# Altium PCB SignalAnalyse.PcbDoc (part 1 of 2)
Units mil, origin at the board's own origin, x right, y up, seen from the top; angles counter-clockwise.
Board outline 5265 x 1800 mil, 2 copper layers (Top Layer, Bottom Layer); 89 components, 53 nets, 353 pads, 52 vias.
Unrouted connection lines stored in the file: 1.
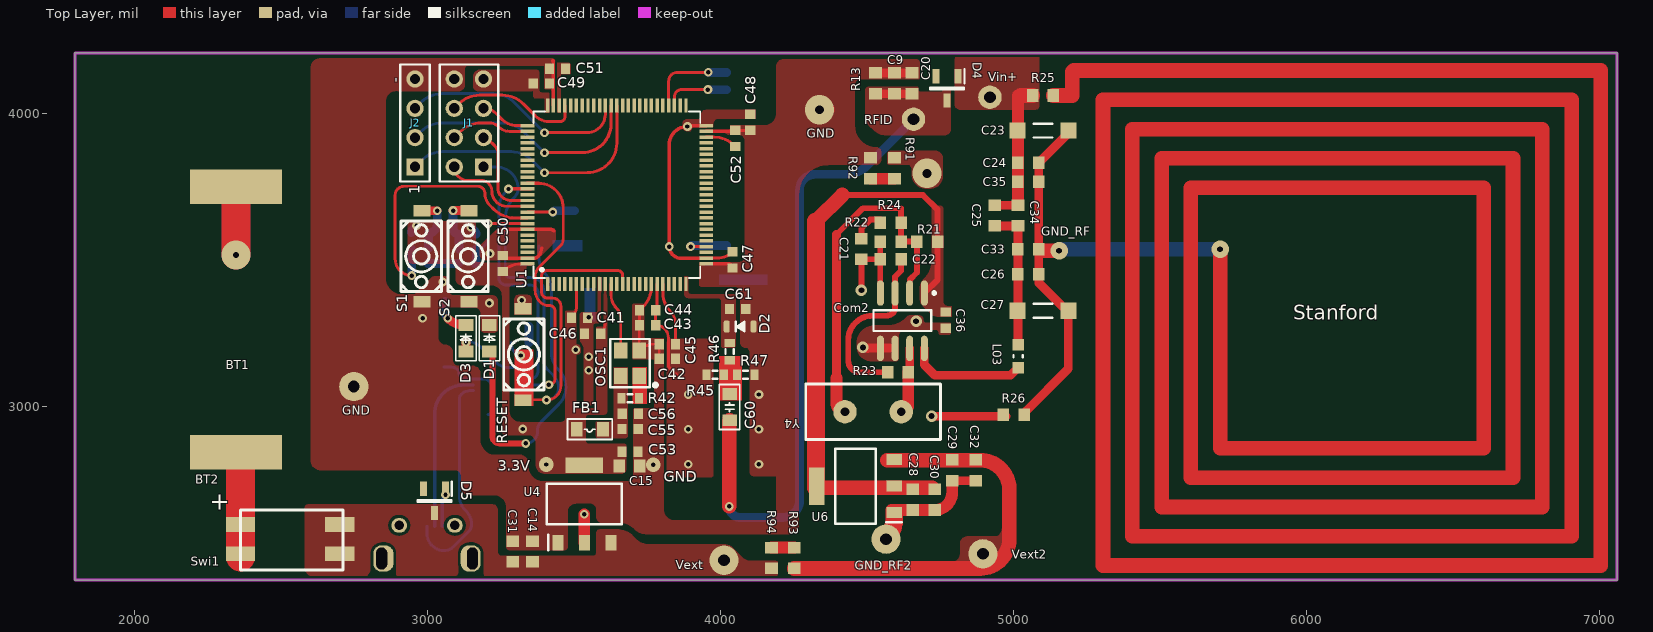
[diagram p0: Top Layer view]
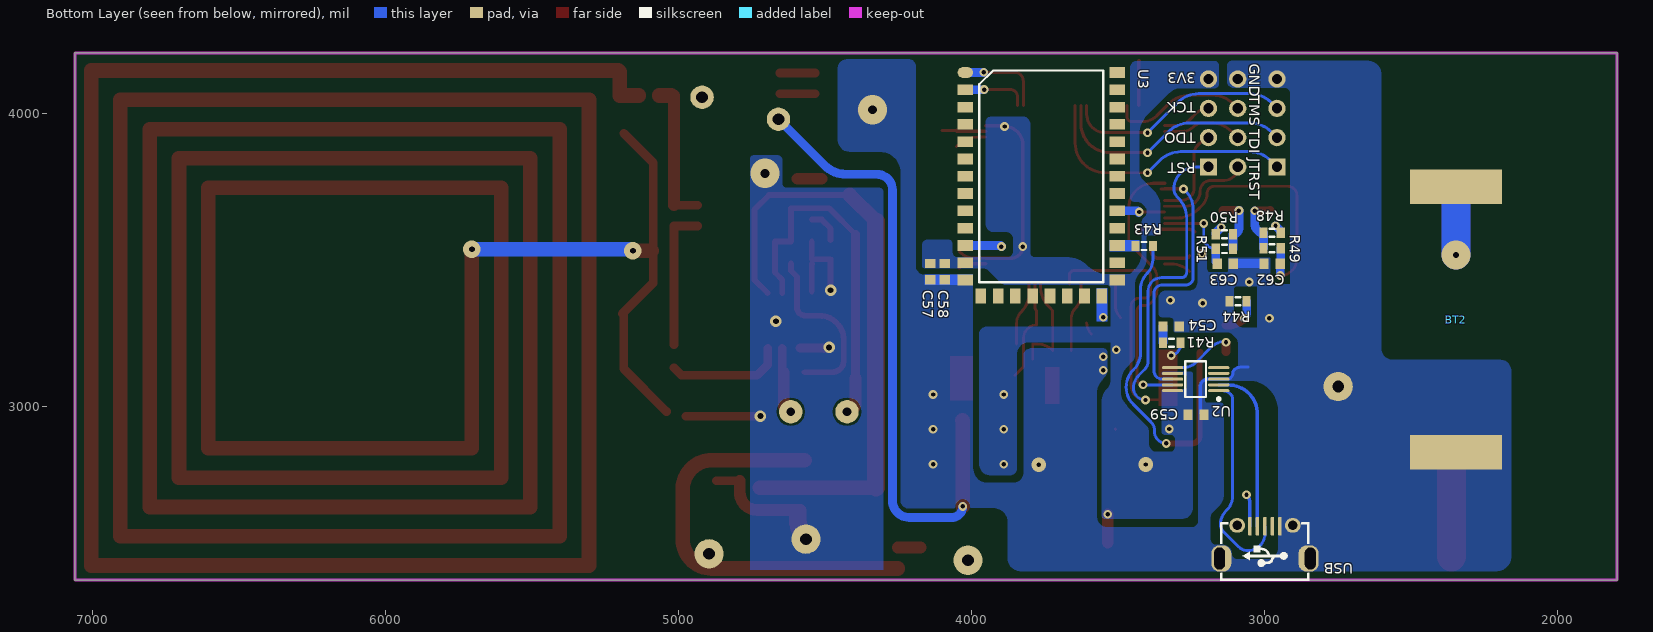
[diagram p1: Bottom Layer view, seen from below]

## Layer stack, top to bottom
Top Solder: solder mask 0.4, Solder Resist, Dk 3.5
Top Layer: signal copper 1.4
Dielectric 1: dielectric 12.6, FR-4, Dk 4.8
Bottom Layer: signal copper 1.4
Bottom Solder: solder mask 0.4, Solder Resist, Dk 3.5

## Board outline
1796,2407 7061,2407 7061,4207 1796,4207

## Design rules (kind name [scope] priority, off if disabled: settings)
Clearance [All] p1: gap=8 ignorepadtopadclearanceinfootprint=FALSE
PlaneClearance [All] p1: clearance=10
PlaneConnect [All] p1: planeconnectstyle=Direct reliefexpansion=20 reliefentries=4 reliefconductorwidth=10 reliefairgap=10
PolygonConnect [All] p1: connectstyle=Direct reliefconductorwidth=10 reliefentries=4 polygonreliefangle="90 Angle" airgapwidth=10
RoutingVias [All] p1: holewidth=15 width=30 viastyle="Through Hole" minholewidth=8 minwidth=20 maxholewidth=50 maxwidth=80
SolderMaskExpansion [All] p1: expansion=4
Width [All] p1: maxlimit=100 minlimit=8 preferedwidth=10
28 further rules are at their usual default settings.

## Classes and differential pairs
component class RFID_transmitter_V2: BT1 BT2 C9 C14 C15 C20 C21 C22 C23 C24 C25 C26 C27 C28 C29 C30 C31 C32 C33 C34 C35 C36 Com2 D4 D5 L03 R13 R21 R22 R23 R24 R25 R26 R91 R92 R93 R94 Swi1 U4 U6 Y4
component class SignalAnalyse: C41 C42 C43 C44 C45 C46 C47 C48 C49 C50 C51 C52 C53 C54 C55 C56 C57 C58 C59 C60 C61 C62 C63 D1 D2 D3 FB1 J1 J2 OSC1 R41 R42 R43 R44 R45 R46 R47 R48 R49 R50 R51 RESET S1 S2 U1 U2 U3 USB

## Components (designator, comment, footprint, x,y, rotation, side; value= is the part's Value field where it differs from the comment)
BT1 "Battery" Battery 2346,3297 r90 top
BT2 "Battery" Battery 2346,3297 r270 bottom
C9 "Cap 10n" 0603 4594,4103.57 r270 top value="200 nF"
C14 "Cap 10u" 0603 3358,2505 r270 top value=10uF
C15 "Cap 22u" 0603 3689,2797 r180 top value=22uF
C20 "Cap 4.7n" 0603 4654,4103.57 r270 top value="50 pF"
C21 "Cap 820p" 0603 4481,3537.98 r90 top value=820pF
C22 "Cap 200p" 0603 4581,3502.98 r0 top value=200pF
C23 "Cap Var" Variable_Capacitor_JZ400HV1 5101,3942 r180 top value=100pF
C24 "Cap" 0603 5051,3832 r180 top value=22pF
C25 "Cap" 0603 4936,3652 r270 top value=27pF
C26 "random value needs carefully address" 0603 5051,3452 r0 top value=470pF
C27 "Cap Var" Variable_Capacitor_JZ400HV1 5101,3327 r180 top value=100pF
C28 "Cap 100n" 0603 4656,2682 r90 top value=100nF
C29 "Cap 10u" 0603 4791,2782 r90 top value=10uF
C30 "Cap 22u" 0603 4731,2682 r90 top value=22uF
C31 "Cap 10n" 0603 3291,2505 r270 top value=10nF
C32 "Cap 10n" 0603 4871,2782 r90 top value=10nF
C33 "random value needs carefully address" 0603 5051,3537 r0 top value=1pF
C34 "Cap" 0603 5016,3652 r270 top value=1pF
C35 "Cap" 0603 5051,3767 r180 top value=1pF
C36 "GRM188R61A226ME15D" 1608[0603] 4769,3295 r270 top value=100nF
C41 "GRM188R61A226ME15D" 1608[0603] 3518.56,3303 r0 top value=1uF
C42 "GRM188R61A226ME15D" 1608[0603] 3818.44,3163 r180 top value=1uF
C43 "GRM188R61A226ME15D" 1608[0603] 3751,3278 r0 top value=1uF
C44 "GRM188R61A226ME15D" 1608[0603] 3751,3328 r0 top value=100nF
C45 "GRM188R61A226ME15D" 1608[0603] 3818.44,3213 r180 top value=100nF
C46 "GRM188R61A226ME15D" 1608[0603] 3563.56,3248 r0 top value=100nF
C47 "GRM188R61A226ME15D" 1608[0603] 4041,3500.56 r90 top value=100nF
C48 "GRM188R61A226ME15D" 1608[0603] 4101,3970.56 r90 top value=100nF
C49 "GRM188R61A226ME15D" 1608[0603] 3388.44,4103 r180 top value=100nF
C50 "GRM188R61A226ME15D" 1608[0603] 3256,3488.44 r270 top value=100nF
C51 "GRM188R61A226ME15D" 1608[0603] 3443.44,4153 r0 top value=2.2uF
C52 "GRM188R61A226ME15D" 1608[0603] 4051,3915.44 r270 top value=2.2uF
C53 "GRM188R61A226ME15D" 1608[0603] 3691,2846 r180 top value=4.7uF
C54 "GRM188R61A226ME15D" 1608[0603] 3318.44,3273 r180 bottom value=100nF
C55 "GRM188R61A226ME15D" 1608[0603] 3691.56,2923 r0 top value=10uF
C56 "GRM188R61A226ME15D" 1608[0603] 3692,2975 r0 top value=100nF
C57 "GRM188R61A226ME15D" 1608[0603] 4141,3460.44 r270 bottom value=10uF
C58 "GRM188R61A226ME15D" 1608[0603] 4091,3460.44 r270 bottom value=1uF
C59 "GRM188R61A226ME15D" 1608[0603] 3233.44,2972 r180 bottom value=10uF
C60 "Cap Ceramic" C0805 4031,2998 r270 top value=22uF
C61 "Cap Semi" 1608[0603] 4058.56,3333 r180 top value=33nF
C62 "GRM188R61A226ME15D" 1608[0603] 2973.56,3488 r0 bottom value=10uF
C63 "GRM188R61A226ME15D" 1608[0603] 3133.56,3488 r180 bottom value=10uF
Com2 "LT1016" LT1016_SOIC 4621,3292.98 r270 top
D1 "LED" D0805 3211,3233 r90 top
D2 "TDZ3V0J" SOD-323 4067,3273 r180 top
D3 "LED-Green" D0805 3131,3233 r90 top
D4 "SMMBD301LT3G" SOT96P237X111-3N 4774,4086 r270 top
D5 "SMMBD301LT3G" SOT96P237X111-3N 3023.4,2677.66 r270 top
FB1 "120Ohm@100MHz" L0805 3554,2922 r180 top value=120R
J1 "JTAG Header" HDR2X4 3191,3818 r90 top
J2 "Header 4" HDR1X4 2957,3818 r90 top
L03 "Inductor 220 nH" Ferrite_bead_0805inch_2012mm 5016,3172 r90 top
OSC1 "16MHz" OSC_3.2X2.5 3691,3148 r90 top
R13 "Res1" 0603 4529,4103.57 r270 top value=1.1k
R21 "Res1 2.2k" 0603 4706,3562.98 r0 top value=2.2K
R22 "Res1 2.2k" 0603 4581,3562.98 r0 top value=2.2K
R23 "Res1 2.2k" 0603 4606,3117 r180 top value=2.2K
R24 "Res1 22" 0603 4581,3627 r0 top value=22Ohm
R25 "" 0603 5101,4062 r180 top value="2.2-antenna resistance value"
R26 "Magnetic Beed" 0603 5001,2972 r0 top value=0
R41 "Res" J1-0603 3316.47,3218 r180 bottom value=1K
R42 "Res" J1-0603 3691.47,3028 r180 top value=1K
R43 "Res" J1-0603 3410.53,3548 r0 bottom value=1K
R44 "Res" J1-0603 3090,3359 r0 bottom value=1K
R45 "Res" J1-0603 3981.47,3108 r180 top value=12K
R46 "Res" J1-0603 4031,3187.53 r90 top value=1K
R47 "Res" J1-0603 4086,3108 r180 top value=10K
R48 "Res" J1-0603 2973.56,3593 r180 bottom value=10K
R49 "Res" J1-0603 2973.56,3540.5 r0 bottom value=1K
R50 "Res" J1-0603 3136.47,3588 r0 bottom value=10K
R51 "Res" J1-0603 3136.47,3538 r180 bottom value=1K
R91 "Magnetic Beed" 0603 4594,3813.43 r270 top value=0
R92 "Magnetic Beed" 0603 4512,3813.43 r90 top value=0
R93 "Magnetic Beed" 0603 4252,2483 r270 top value="0 Ohm"
R94 "Magnetic Beed" 0603 4174,2483 r90 top value="0 Ohm"
RESET "Button" K2-1107ST-A4SW-06 3326,3022 r90 top (schematic designator S3)
S1 "Button" K2-1107ST-A4SW-06 2981,3669 r270 top
S2 "Button" K2-1107ST-A4SW-06 3141,3669 r270 top
Swi1 "Switch_219-2MSTR" Switch_219-2MSTR 2361,2547 r270 top
U1 "STM32F767VIT6" STM32F767VIT6 3646,3723 r90 top value=Value
U2 "CH340E" CH340E 3234.74,3093.32 r0 bottom
U3 "HC-06" HC-06 4021,4140.44 r180 bottom
U4 "LT1117IST-3.3#PBF" SOT230P700X180-4N 3535,2667 r90 top
U6 "LT1117IST-5#PBF" SOT230P700X180-4N 4461,2728 r180 top
USB "MicroUSB" USB_Micro-AB 2998,2491 r0 bottom (schematic designator CON2)
Y4 "TSX3325_13.56MHz" HC_49Crystal 4521,2982 r180 top

## Footprints (in the part's own frame and the unit in brackets; to place one, negate y for a bottom-side part, rotate by r counter-clockwise, add the part's x,y. Pads: shape width x height; smd on the part's side, far side on the other; paste and mask are expansions set on the pad)
0603 [mm] "0603Resistor_Capacitor"
  rect 1x1.1 smd: 1(-0.9,0) 2(0.9,0)
  body extent -0.77,-0.45 0.77,0.45, height 0.45
1608[0603] [mm] "Chip Capacitor, Body 1.6x0.8mm, IPC High Density"
  rect 0.8x0.9 smd: 1(-0.7,0) 2(0.7,0)
  body extent -0.87,-0.48 0.87,0.48, height 1.3
Battery [mm]
  rect 3x8 smd: 1(-11.508,0) 2(11.508,0)
C0805 [mil]
  rect 40x50 smd: 1(45,0) 2(-45,0)
  silkscreen extent -77,-35 77,35, body extent -49,-24 49,25, height 31
CH340E [mm] "MSOP, 10-Leads, Body 3.00x3.00mm, Pitch 0.50mm, IPC Medium Density"
  oval 1.85x0.254 smd: 1(-2,1) 2(-2,0.5) 3(-2,0) 4(-2,-0.5) 5(-2,-1) 6(2,-1) 7(2,-0.5) 8(2,0) 9(2,0.5) 10(2,1)
  silkscreen extent -2.12,-1.55 0.9,1.85, body extent -1.55,-1.55 1.55,1.55, height 1.1
D0805 [mil]
  rect 40x50 smd: 1(-45,0) 2(45,0)
  silkscreen extent -77,-35 77,35, body extent -40,-25 40,25, height 43
Ferrite_bead_0805inch_2012mm [mm] "Ferrite_bead_MH2029-300Y"
  rect 1x1 smd: 1(-1,0) 2(1,0)
  silkscreen extent -0.1,-0.4 0.1,0.4, body extent -1.1,-0.7 1.1,0.7, height 1.1
HC-06 [mm]
  oval 1.34x0.923 smd: 1(0,0)
  rect 1.34x0.923 smd: 2(0,-1.5) 3(0,-3) 4(0,-4.5) 5(0,-6) 6(0,-7.5) 7(0,-9) 8(0,-10.5) 9(0,-12) 10(0,-13.5) 11(0,-15) 12(0,-16.5) 13(0,-18) 22(13.177,-18) 23(13.177,-16.5) 24(13.177,-15) 25(13.177,-13.5) 26(13.177,-12) 27(13.177,-10.5) 28(13.177,-9) 29(13.177,-7.5) 30(13.177,-6) 31(13.177,-4.5) 32(13.177,-3) 33(13.177,-1.5) 34(13.177,0)
  rect 0.923x1.34 smd: 14(1.339,-19.385) 15(2.839,-19.385) 16(4.339,-19.385) 17(5.838,-19.385) 18(7.338,-19.385) 19(8.838,-19.385) 20(10.338,-19.385) 21(11.838,-19.385)
  silkscreen extent 1.2,-18.18 11.97,0.18, body extent 0.09,-19.28 17.75,7.72, height 0.25
HC_49Crystal [mil]
  round 80 hole 30: 1(-96,0) 3(96,0)
  silkscreen extent -230,-95 230,95
HDR1X4 [mm] "Connector; Header; 4 Position"
  rect 1.5x1.5 hole 0.9: 1(0,0)
  round 1.5 hole 0.9: 2(2.54,0) 3(5.08,0) 4(7.62,0)
  silkscreen extent -1.27,-1.27 8.89,1.27
HDR2X4 [mm] "Connector; Header; 4x2 Position"
  rect 1.5x1.5 hole 0.9: 1(0,0)
  round 1.5 hole 0.9: 2(0,2.54) 3(2.54,0) 4(2.54,2.54) 5(5.08,0) 6(5.08,2.54) 7(7.62,0) 8(7.62,2.54)
  silkscreen extent -1.27,-1.27 8.89,3.81
J1-0603 [mm] "Chip Resistor, Body 1.6x0.8mm, IPC High Density"
  rect 0.7x0.9 smd: 1(-0.75,0) 2(0.75,0)
  silkscreen extent -0.2,-0.35 0.2,0.35, body extent -0.85,-0.48 0.85,0.48, height 0.9
K2-1107ST-A4SW-06 [mm] "50mA @ 12VDC Rectangular Button"
  rect 1x1.5 smd: 1(0,0) 2(7.899,0)
  silkscreen extent 0.89,-1.83 7.04,1.68, body extent 0.9,-1.8 7.02,1.8, height 1.8
L0805 [mil]
  rect 40x50 smd: 1(45,0) 2(-45,0)
  silkscreen extent -77,-35 77,35, body extent -49,-24 49,25, height 31
LT1016_SOIC [mm] "LT1016_Comparator_SOIC"
  oval 2.2x0.6 smd: 1(-2.4,1.905) 2(-2.4,0.635) 3(-2.4,-0.635) 4(-2.4,-1.905) 5(2.4,-1.905) 6(2.4,-0.635) 7(2.4,0.635) 8(2.4,1.905)
  silkscreen extent -2.52,-2.5 0.9,2.88, body extent -2,-2.5 2,2.5, height 1.76
OSC_3.2X2.5 [mm] "SG-310SCF SMD-3225_4P"
  rect 1.4x1.15 smd: 1(-1.1,-0.8) 2(1.1,-0.8) 3(1.1,0.8) 4(-1.1,0.8)
  silkscreen extent -2.1,-2.35 2.1,1.7, body extent -1.6,-1.25 1.6,1.25, height 0.61
SOD-323 [mil]
  rrect50% 20x40 smd: 1(-46,0) 2(46,0)
  silkscreen extent -16,-18 16,18, body extent -51,-27 51,27, height 43
SOT96P237X111-3N [mm]
  rect 1.25x0.6 smd: 1(-1.05,0.955) 2(-1.05,-0.955) 3(1.05,0)
  silkscreen extent -1.68,-1.46 0.08,1.51, body extent -1.18,-1.46 1.18,1.46, height 1.11
SOT230P700X180-4N [mm]
  rect 1.35x0.95 smd: 1(-3.35,2.3) 2(-3.35,0) 3(-3.35,-2.3)
  rect 1.35x3.25 smd: 4(3.35,0)
  silkscreen extent -4.03,-3.25 1.75,3.25, body extent -3.5,-3.25 3.5,3.25, height 1.8
STM32F767VIT6 [mm] "LQPF100, 100-Leads, Body 14.00x14.00mm, Pitch 0.50mm, IPC Medium Density"
  rect 1.2x0.3 smd: 1(-7.75,6) 2(-7.75,5.5) 3(-7.75,5) 4(-7.75,4.5) 5(-7.75,4) 6(-7.75,3.5) 7(-7.75,3) 8(-7.75,2.5) 9(-7.75,2) 10(-7.75,1.5) 11(-7.75,1) 12(-7.75,0.5) 13(-7.75,0) 14(-7.75,-0.5) 15(-7.75,-1) 16(-7.75,-1.5) 17(-7.75,-2) 18(-7.75,-2.5) 19(-7.75,-3) 20(-7.75,-3.5) 21(-7.75,-4) 22(-7.75,-4.5) 23(-7.75,-5) 24(-7.75,-5.5) 25(-7.75,-6) 51(7.75,-6) 52(7.75,-5.5) 53(7.75,-5) 54(7.75,-4.5) 55(7.75,-4) 56(7.75,-3.5) 57(7.75,-3) 58(7.75,-2.5) 59(7.75,-2) 60(7.75,-1.5) 61(7.75,-1) 62(7.75,-0.5) 63(7.75,0) 64(7.75,0.5) 65(7.75,1) 66(7.75,1.5) 67(7.75,2) 68(7.75,2.5) 69(7.75,3) 70(7.75,3.5) 71(7.75,4) 72(7.75,4.5) 73(7.75,5) 74(7.75,5.5) 75(7.75,6)
  rect 0.3x1.2 smd: 26(-6,-7.75) 27(-5.5,-7.75) 28(-5,-7.75) 29(-4.5,-7.75) 30(-4,-7.75) 31(-3.5,-7.75) 32(-3,-7.75) 33(-2.5,-7.75) 34(-2,-7.75) 35(-1.5,-7.75) 36(-1,-7.75) 37(-0.5,-7.75) 38(0,-7.75) 39(0.5,-7.75) 40(1,-7.75) 41(1.5,-7.75) 42(2,-7.75) 43(2.5,-7.75) 44(3,-7.75) 45(3.5,-7.75) 46(4,-7.75) 47(4.5,-7.75) 48(5,-7.75) 49(5.5,-7.75) 50(6,-7.75) 76(6,7.75) 77(5.5,7.75) 78(5,7.75) 79(4.5,7.75) 80(4,7.75) 81(3.5,7.75) 82(3,7.75) 83(2.5,7.75) 84(2,7.75) 85(1.5,7.75) 86(1,7.75) 87(0.5,7.75) 88(0,7.75) 89(-0.5,7.75) 90(-1,7.75) 91(-1.5,7.75) 92(-2,7.75) 93(-2.5,7.75) 94(-3,7.75) 95(-3.5,7.75) 96(-4,7.75) 97(-4.5,7.75) 98(-5,7.75) 99(-5.5,7.75) 100(-6,7.75)
  silkscreen extent -7.23,-7.23 7.23,7.23, body extent -8,-8 8,8, height 1.6
Switch_219-2MSTR [mil]
  rect 50x100 smd: 1(-50,0) 2(50,0) 3(-50,339) 4(50,339)
  silkscreen extent -100,0 105,350
USB_Micro-AB [mil]
  rrect80% 68x90 hole 37 slot 75 at 90 deg copper offset 6,0 mask+0: 0(-155,10)
  oval 54x50 hole 32 mask+0: 0(-95,-103) 0(95,-103)
  rrect80% 68x90 hole 37 slot 75 at 90 deg copper offset -6,0 mask+0: 0(155,10)
  rrect50% 12x64 smd: 1(51.18,-100) 2(25.59,-100) 3(0,-100) 4(-25.59,-100) 5(-51.18,-100)
  silkscreen extent -150,-112 150,86, body extent -161,-109 161,104, height 108
Variable_Capacitor_JZ400HV1 [mm] "Variable_Capacitor_JZ400HV"
  rect 1.4x1.4 smd: 1(-2.2,0) 2(2.2,0)
  silkscreen extent -0.8,-0.6 0.8,0.6, body extent -3.3,-1.72 3.05,1.73, height 1.45

## Part data
BT1 BT2: "Multicell Battery", LatestRevisionDate=17-Jul-2002, LatestRevisionNote="Re-released for DXP Platform.", PackageDescription="Battery; 2 Leads", PackageReference=BAT-2, Published=24-Mar-1999, Publisher="Altium Limited"
C9 C14 C15 C20 C21 C22 C28 C29 C30 C31 C32: library part Cap, "Capacitor", LatestRevisionDate=17-Jul-2002, LatestRevisionNote="Re-released for DXP Platform.", PackageDescription="Radial Cap, Thru-Hole; 2 Leads; 0.3 in Pin Spacing", PackageReference=RAD-0.3, Published=8-Jun-2000, Publisher="Altium Limited"
C23 C27: "Variable or Adjustable Capacitor", Code_IPC=CAPC3225, Code_JEITA=1210, LatestRevisionDate=29-May-2009, LatestRevisionNote="IPC-7351 Footprint Added.", PackageDescription="Chip Capacitor 1210 Case Size", PackageReference=C1210, Published=24-Mar-1999, Publisher="Altium Limited"
C24 C25 C34 C35: "Capacitor_for resonance", LatestRevisionDate=17-Jul-2002, LatestRevisionNote="Re-released for DXP Platform.", PackageDescription="Radial Cap, Thru-Hole; 2 Leads; 0.3 in Pin Spacing", PackageReference=RAD-0.3, Published=8-Jun-2000, Publisher="Altium Limited"
C26 C33: library part Cap, "Capacitor_for resonance", LatestRevisionDate=17-Jul-2002, LatestRevisionNote="Re-released for DXP Platform.", PackageDescription="Radial Cap, Thru-Hole; 2 Leads; 0.3 in Pin Spacing", PackageReference=RAD-0.3, Published=8-Jun-2000, Publisher="Altium Limited"
C36 C53 C55 C57 C59 C62 C63: library part "Cap Semi", "Capacitor (Semiconductor SIM Model)", Voltage=10V, LatestRevisionDate=29-May-2009, LatestRevisionNote="IPC-7351 Footprint Added.", PackageDescription="Chip Capacitor", PackageReference=C1206, Published=8-Jun-2000, Publisher="Altium Limited"
C41 C42 C43 C44 C45 C46 C47 C48 C49 C50 C54 C56 C58: library part "Cap Semi", "Capacitor (Semiconductor SIM Model)", Voltage=50V, LatestRevisionDate=29-May-2009, LatestRevisionNote="IPC-7351 Footprint Added.", PackageDescription="Chip Capacitor", PackageReference=C1206, Published=8-Jun-2000, Publisher="Altium Limited"
C51 C52: library part "Cap Semi", "Capacitor (Semiconductor SIM Model)", Voltage=16V, LatestRevisionDate=29-May-2009, LatestRevisionNote="IPC-7351 Footprint Added.", PackageDescription="Chip Capacitor", PackageReference=C1206, Published=8-Jun-2000, Publisher="Altium Limited"
C60: library part C-Ceramic, Voltage=25V
C61: "Capacitor (Semiconductor SIM Model)", Voltage=50V, LatestRevisionDate=29-May-2009, LatestRevisionNote="IPC-7351 Footprint Added.", PackageDescription="Chip Capacitor", PackageReference=C0603, Published=8-Jun-2000, Publisher="Altium Limited"
D1: "UWB_TX_LED"
D2: library part "D Zener", "Zener Diode 3V", LatestRevisionDate=17-Jul-2002, LatestRevisionNote="Re-released for DXP Platform.", PackageDescription="Diode, Thru-Hole; 2 Leads; 0.7 in Pin Spacing", PackageReference=DIODE-0.7, Published=8-Jun-2000, Publisher="Altium Limited"
D3: library part LED
D4 D5: "Schottky Barrier Diodes", Manufacturer_Name="ON Semiconductor", Datasheet Link=https://altium.componentsearchengine.com/Datasheets/1/SMMBD301LT3G.pdf, Height=1.11mm, Manufacturer_Part_Number=SMMBD301LT3G
FB1: library part FB, "CBW201209U121T"
J1: library part "Header 4X2", "Header, 4-Pin, Dual row", LatestRevisionDate=17-Jul-2002, LatestRevisionNote="Re-released for DXP Platform.", Publisher="Altium Limited"
J2: "Header, 4-Pin", LatestRevisionDate=17-Jul-2002, LatestRevisionNote="Re-released for DXP Platform.", Publisher="Altium Limited"
L03: library part Component_1, "220nH"
OSC1: library part OSC2, "OSC with disable function"
R13: "Resistor", LatestRevisionDate=17-Jul-2002, LatestRevisionNote="Re-released for DXP Platform.", PackageDescription="Axial Device, Thru-Hole; 2 Leads; 0.3 in Pin Spacing", PackageReference=AXIAL-0.3, Published=8-Jun-2000, Publisher="Altium Limited"
R21 R22 R23 R24 R25 R93 R94: library part Res1, "Resistor", LatestRevisionDate=17-Jul-2002, LatestRevisionNote="Re-released for DXP Platform.", PackageDescription="Axial Device, Thru-Hole; 2 Leads; 0.3 in Pin Spacing", PackageReference=AXIAL-0.3, Published=8-Jun-2000, Publisher="Altium Limited"
R26 R91 R92: library part Res1, "Wurth Magnetic Bead", LatestRevisionDate=17-Jul-2002, LatestRevisionNote="Re-released for DXP Platform.", PackageDescription="Axial Device, Thru-Hole; 2 Leads; 0.3 in Pin Spacing", PackageReference=AXIAL-0.3, Published=8-Jun-2000, Publisher="Altium Limited"
R41 R42 R43 R44 R45 R46 R47 R48 R49 R50 R51: library part Res3, "Resistor", LatestRevisionDate=29-May-2009, LatestRevisionNote="IPC-7351 Footprint Added.", PackageDescription="Chip Resistor", PackageReference=J1-0603, Published=8-Jun-2000, Publisher="Altium Limited"
U1: library part STM32F76XVXT, "Imported", Manufacturer_Part_Number=stm32f76xvxt, C="Copyright (C) 2016 Accelerated Designs. All rights reserved", Copyright="Copyright (C) 2016 Accelerated Designs. All rights reserved", RefDes=RefDes, Type=Type, Vendor=STMicroelectronics
U2: "USB-UART Converter"
U3: "Decawave's DW1000 Ultra Wideband (UWB) transceiver IC"
U4: "Integrated Circuit", Manufacturer_Name="Analog Devices", Mouser Part Number=584-LT1117IST-3.3PBF, Datasheet Link=https://www.analog.com/media/en/technical-documentation/data-sheets/1117fd.pdf, Height=1.8mm, Manufacturer_Part_Number=LT1117IST-3.3#PBF
USB: library part USB_Micro, "USB", Type=B-type
Y4: library part TSX3325

## Free pads (board coordinates)
  round 100 hole 40: 0(2748,3068) 0(4012,2475) 2(4565.17,2547) 2(4896,2497)
  round 80 hole 40: 2(4659,3981) 2(4920,4056)

## Via types
v1: diameter 30, hole 15, Top Layer to Bottom Layer, 41 vias
v2: diameter 40, hole 20, Top Layer to Bottom Layer, 4 vias
v3: diameter 100, hole 30, Top Layer to Bottom Layer, 2 vias
v4: diameter 60, hole 20, Top Layer to Bottom Layer, 2 vias
v5: diameter 50, hole 15, Top Layer to Bottom Layer, 2 vias
v6: diameter 100, hole 20, Top Layer to Bottom Layer, 1 vias

## Nets (pads, with @x,y where several pads share a name; then routed paths per layer and width w, separated by ;. In a path a pad name is that pad's centre, name@x,y a point inside that pad or via, vN(x,y) a via of type N, cw(c..) or ccw(c..) an arc to the next point about the centre after c; other vN are vias at no path point)
3.3V: C15.2 C41.1 C42.1 C43.2 C44.2 C45.1 C46.2 C47.2 C48.2 C49.2 C50.2 C53.2 C57.1 C58.1 C59.1 FB1.1 J1.7 R45.2 R48.2 R50.2 U1.6 U1.11 U1.20 U1.21 U1.27 U1.50 U1.75 U1.100 U2.7 U2.10 U3.12 U3.22 U4.2 U4.4 | length 1735.8
  Top Layer w10: C50.2@3256,3460.88 cw(c3318.52,3398.36) 3318.52,3486.78 U1.100@3340.88,3486.78 ; C41.1@3491,3303 ccw(c3449.46,3344.54) 3508.2,3344.54 U1.6@3508.2,3417.88 ; FB1.1@3508,2923 FB1.1@3509,2922 ; C46.2@3591.12,3248 ccw(c3553.67,3285.45) 3606.63,3285.45 ; U1.20@3783.8,3417.88 3783.8,3340.64 cw(c3765.92,3340.64) C44.2@3778.56,3328 C43.2@3778.56,3278 cw(c3778.56,3234.56) 3822,3234.56 3822,3136 3852,3106 ; U1.21@3803.48,3417.88 3803.48,3387.02 ccw(c3894.02,3387.02) 3830,3323 cw(c3791.37,3284.37) 3846,3284.37 C45.1@3846,3213 ; U1.27@3951.12,3506.46 3988.72,3506.46 ccw(c3988.72,3580.39) C47.2@4041,3528.12
  Top Layer w12: U1.27@3951.12,3506.46 3864.54,3506.46 cw(c3864.54,3546) v1(3825,3546) 3825,3894 cw(c3887,3894) v1(3887,3956) cw(c3890.22,3956) 3890.22,3959.22 U1.50@3951.12,3959.22
  Top Layer w40: U4.2@3535,2535.11 v1(3535,2632)
  Bottom Layer w30: R48.2@2944.03,3593 cw(c2958.59,3593) 2948.3,3603.3 v1(2962,3617) ; v1(3147,3612) 3162.46,3596.54 cw(c3153.93,3588) R50.2@3166,3588
  other v1: 3890,2803 3890,2922 3325,2923 3890,3041 3506,3194
  other v5: 3405,2802
ADC: C61.2 D2.2 R46.2 U1.25
B\T\_\R\S\T\: U1.29 U3.11 | length 178.5
  Top Layer w10: v1(3898,3546) 3898,3545.83 U1.29@3951.12,3545.83
  Bottom Layer w30: v1(3898,3546) cw(c3901.89,3546) 3901.89,3549.89 U3.11@4021,3549.89
BT_CLR: U1.91 U3.26 | length 165.9
  Top Layer w10: U1.91@3340.88,3663.95 v1(3427.05,3663.95)
  Bottom Layer w10: v1(3427.05,3663.95) cw(c3427.05,3662) v1@3429,3662
  Bottom Layer w30: v1@3429,3662 cw(c3435,3662) 3435,3668 U3.26@3502.22,3668
BT_RXD: U1.53 U3.2 | length 226.4
  Top Layer w10: U1.53@3842.85,4028.12 3842.85,4057.85 cw(c3867,4057.85) 3867,4082 v1(3957,4082)
  Bottom Layer w10: v1(3957,4082) cw(c3957,4079) 3958.82,4081.39 cw(c3957,4079) v1@3960,4079
  Bottom Layer w30: v1@3957,4081.39 3958.82,4081.39 U3.2@4021,4081.39
BT_TXD: U1.54 U3.1 | length 298.9
  Top Layer w10: U1.54@3823.17,4028.12 3823.17,4111.17 cw(c3853,4111.17) 3853,4141 v1(3958,4141)
  Bottom Layer w10: v1(3958,4141) cw(c3958,4140) v1@3959,4140
  Bottom Layer w30: v1@3959,4140 4021,4140 U3.1@4021,4140.44
GND: BT2.2 C9.1 C14.1 C15.1 C20.1 C31.1 C41.2 C42.2 C43.1 C44.1 C45.2 C46.1 C47.1 C48.1 C49.1 C50.1 C51.1 C52.1 C53.1 C54.2 C55.2 C56.2 C57.2 C58.2 C59.2 C61.1 C62.2 C63.2 D1.2 D2.1 J1.8 J2.4 OSC1.2 pad.0@2748,3068 R13.1 R44.2 R47.1 R92.2 RESET.2 S1.2 S2.2 U1.10 U1.19 U1.26 U1.49 U1.74 U1.94 U1.99 U2.3 U3.13 U3.21 U4.1 USB.0 USB.5 | length 1672.4
  Top Layer w10: C50.1@3256,3516 ccw(c3265.54,3516) C50.1@3265.54,3506.46 ; U1.19@3764.11,3417.88 3764.11,3410.09 cw(c3664.11,3410.09) 3734.82,3339.38 C44.1@3723.44,3328 C43.1@3723.44,3278 ccw(c3725.72,3275.72) 3722.5,3275.72 OSC1.2@3722.5,3191.31 cw(c3774.87,3138.94) 3774.87,3213 C45.2@3790.88,3213 C42.2@3790.88,3163 C42.2@3791,3162.88 ; U1.26@3950.34,3486 ccw(c3950.34,3486.78) U1.26@3951.12,3486.78 ; C52.1@4051,3943 C48.1@4101,3943
  Top Layer w12: 3238,3596 cw(c3259.46,3574.54) 3259.46,3604.89 U1.94@3340.88,3604.89 3419.19,3604.89 cw(c3419.19,3588.19) 3431,3600 ; C50.1@3265.54,3506.46 U1.99@3340.88,3506.46 3365.38,3506.46 ccw(c3365.38,3519.37) 3374.5,3510.24 3377.5,3513.24 ccw(c3349.75,3541) 3389,3541 ; 3427,4180 cw(c3427,4177.54) 3429.46,4177.54 U1.74@3429.46,4028.12 ; U1.26@3951.12,3486.78 4027.22,3486.78 cw(c4027.22,3473) C47.1@4041,3473 ; U1.49@3951.12,3939.54 4047.54,3939.54 ccw(c4047.54,3943) C52.1@4051,3943
  Top Layer w30: R13.1@4534,4139 C9.1@4594,4139 C20.1@4654,4139
  Top Layer w60: v3(4338,4013) v3@4359,4013
  Bottom Layer w10: 3056,3134.18 3081.77,3134.18 cw(c3081.77,3105.1) 3102.34,3125.66 cw(c3089.68,3113) 3107.58,3113 ccw(c3124.58,3113) 3112.56,3100.98 3116.77,3096.77 ccw(c3125.11,3105.11) 3125.11,3093.31 U2.3@3156,3093.32 3193.68,3093.32 cw(c3193.68,3069) 3218,3069 3218,2984.12 cw(c3205.88,2984.12) C59.2@3205.88,2972
  Bottom Layer w30: C62.2@3001.12,3488 C63.2@3106,3488
  other v1: 4131,2803 4131,2922 4131,3041 3550,3124 3550,3170 2983,3301.41 3550,3305 3211,3353 3321,3363 3052,3425 3213,3522
  other v5: 3770,2801
GND_RF: C23.1 C24.1 C26.2 C27.1 C33.2 C35.1 R25.1 R26.2 | length 27641.1
  Top Layer w30: R26.2@5041.43,2982.43 5187.61,3128.61 C27.1@5187.61,3316.41 ; C23.1@5187.61,3933.18 C24.1@5086.43,3832 C35.1@5086.43,3767 5086.43,3422 C27.1@5192.02,3316.41
  Top Layer w50: C33.2@5091.43,3532 v4(5156,3532) ; R25.1@5136.43,4062 5201,4062 5201,4142 ; 5206,4147 7006,4147 7006,2457 5306,2457 5306,4047 6906,4047 6906,2557 5406,2557 5406,3947 6806,3947 6806,2657 5506,2657 5506,3847 6706,3847 6706,2757 5606,2757 5606,3747 6606,3747 6606,2857 5706,2857 v4(5706,3537)
  Bottom Layer w50: v4@5161,3537 v4(5706,3537)
GND_RF2: C21.1 C22.1 C28.1 C29.1 C30.1 C32.1 C36.2 Com2.4 Com2.5 Com2.6 pad.2@4565.17,2547 R22.1 R26.1 R91.1 U6.1 | length 1123.8
  Top Layer w20: v2(4481,3397) C21.1@4481,3502.55 4481.43,3502.98 C22.1@4545.57,3502.98 R22.1@4545.57,3562.98 ; C22.1@4545.13,3487.55 4545.57,3487.98 Com2.4@4545.57,3392.91
  Top Layer w30: v2@4502.5,3198.5 4503.99,3199.99 Com2.6@4586,3199.99 ; v2(4721,2967) R26.1@4975.57,2967 ; C29.1@4791,2746.57 C32.1@4871,2746.57
  Top Layer w40: U6.1@4584,2646.57 C28.1@4656,2646.57 C30.1@4731,2646.57 ccw(c4731,2706.57) 4786,2682.59 ccw(c4731,2706.57) 4791,2706.57 C29.1@4791,2746.57
  Top Layer w60: pad.2@4565.17,2547 ccw(c4498.26,2613.91) 4592.89,2613.91 U6.1@4592.89,2637.45
  other v2: 4486,3202 4668,3291
  other v3: 4705,3796
J\T\R\S\T\: J1.2 U1.90 | length 326.6
  Top Layer w10: J1.2@3091,3818 ccw(c3137,3818) 3137,3772 3182.5,3772 cw(c3182.5,3735) 3219.5,3735 ccw(c3270.87,3735) 3268.66,3683.68 ccw(c3270.87,3735) 3270.87,3683.63 U1.90@3340.88,3683.63
KEY1: C62.1 R49.1 U1.92 | length 932
  Top Layer w10: v1(2946,3447) cw(c2946,3503.9) 2889.1,3503.9 2889.1,3721.1 cw(c2920,3721.1) 2920,3752 3171,3752 cw(c3171,3727) 3196,3727 ccw(c3253.3,3727) 3212.78,3686.49 3225.72,3673.55 ccw(c3296.43,3744.26) 3288.5,3644.57 ; 3282.23,3644.26 U1.92@3340.88,3644.26
  Bottom Layer w30: R49.1@2944.03,3540.5 2944.03,3492.75 ccw(c2950.75,3492.75) C62.1@2946,3488 v1(2946,3447)
KEY2: C63.1 R51.1 U1.93 | length 296.3
  Top Layer w10: v1@3207,3624.26 v1@3207,3624.57 ; v1(3207,3625) v1@3207,3624.57 ; U1.93@3340.88,3624.57 v1@3207,3624.57
  Bottom Layer w10: R51.1@3166,3538 ccw(c3166,3579) 3207,3579 v1(3207,3625)
  Bottom Layer w30: C63.1@3161.12,3488 ccw(c3149.33,3499.79) 3166,3499.79 R51.1@3166,3538
NetBT1_1: BT1.1 Swi1.1 Swi1.2 | length 383.1
  Top Layer w30: BT1.1@2346,2863.93 BT1.1@2361,2848.93
  Top Layer w100: Swi1.2@2361,2487 2361,2587 BT1.1@2361,2848.93
NetBT1_2: BT1.2 BT2.1 | length 426.1
  Top Layer w100: v6(2346,3517) BT1.2@2346,3730.07
  Bottom Layer w100: v6(2346,3517) BT2.1@2346,3730.07
NetC21_2: C21.2 R24.1 | length 116.6
  Top Layer w20: C21.2@4481,3568.42 4481,3607.98 4511,3637.98 R24.1@4545.57,3637.98
NetC22_2: C22.2 Com2.3 R23.2 | length 609.2
  Top Layer w20: R23.2@4570.57,3117 4476,3117 cw(c4476,3157) 4436,3157 4436,3227 cw(c4519,3227) 4519,3310 4568,3310 ccw(c4568,3338) 4596,3338 Com2.3@4596,3387.47 4596,3442.98 4616.43,3463.42 C22.2@4616.43,3487.98
NetC25_2: C25.2 C26.1 C27.2 C33.1 C34.2 L03.2 | length 484.8
  Top Layer w30: C25.2@4936,3616.57 5015.57,3616.57 C26.1@5015.57,3452 L03.2@5015.57,3211.37
NetC51_2: C51.2 U1.73
NetC52_2: C52.2 U1.48 | length 108.8
  Top Layer w10: U1.48@3951.12,3919.85 3977.61,3919.85 cw(c3977.61,3819.85) 4048.32,3890.56 C52.2@4051,3887.88
NetC54_1: C54.1 R41.1 | length 55
  Bottom Layer w30: R41.1@3346,3218 C54.1@3346,3273
NetC55_1: C55.1 C56.1 FB1.2 OSC1.4 R42.2
NetC60_2: C60.2 R45.1 R46.1 R47.2 | length 3.5
  Top Layer w0: R47.2@4056.47,3104.5 R47.2@4056.47,3108
NetCom2_2: Com2.2 R21.1 R22.2 R24.2 Y4.3 | length 1233.1
  Top Layer w20: 4396,3587 4486,3677 4616.43,3677 R24.2@4616.43,3627 R22.2@4616.43,3562.98 R21.1@4670.57,3562.98 4670.57,3457.55 4646,3432.98 Com2.2@4646,3387.47
  Top Layer w30: 4396,3097 4396,3587
  Top Layer w40: 4396,3097 4396,3011 ccw(c4425,3011) Y4.3@4425,2982
NetCom2_7: Com2.7 R23.1 Y4.1 | length 233
  Top Layer w30: R23.1@4641.43,3117 ccw(c4641.43,3121.57) 4646,3121.57 Com2.7@4646,3198.5
  Top Layer w40: Y4.1@4617,2982 ccw(c4617,3006.43) 4641.43,3006.43 R23.1@4641.43,3117
NetCom2_8: Com2.8 L03.1 | length 401.2
  Top Layer w30: Com2.8@4696,3198.5 4696,3142.63 4731.63,3107 4990.37,3107 L03.1@5016,3132.63
NetD1_1: D1.1 R43.1 | length 1173.4
  Top Layer w20: D1.1@3217.98,3186.5 cw(c3217.98,3183.48) 3220.55,3185.06 cw(c3217.98,3183.48) 3221,3183.48 3221,2899 ccw(c3246,2899) 3228,2881.65 ccw(c3246,2899) 3246,2874 v1(3335,2874)
  Bottom Layer w10: v1(3335,2874) ccw(c3335,2914) 3375,2914 3375,2917 cw(c3418.46,2917) 3387.73,2947.73 3447.96,3007.96 ccw(c3389.92,3066) 3472,3066 ccw(c3389.92,3066) 3447.96,3124.04 cw(c3508.21,3184.3) 3423,3184.3 3423,3399.47 ccw(c3344.47,3399.47) 3400,3455 cw(c3445.87,3500.87) 3381,3500.87 R43.1@3381,3548
NetD3_1: D3.1 U2.6 | length 246
  Top Layer w30: D3.1@3131,3188 3131,3219 v1(3131.12,3219.12)
  Bottom Layer w10: v1(3131.12,3219.12) 3134,3222 cw(c3134,3154.4) 3181.8,3202.2 3232,3152 ccw(c3278.63,3198.63) 3278.63,3132.69 U2.6@3313.48,3132.69
NetD3_2: D3.2 R44.1 | length 128.4
  Top Layer w30: v1(3068.59,3301.41) ccw(c3125.11,3357.94) 3125.11,3278 D3.2@3131,3278
  Bottom Layer w30: R44.1@3060.47,3359 3060.47,3321 ccw(c3088.17,3321) v1(3068.59,3301.41)
NetOSC1_1: OSC1.1 R42.1
NetOSC1_3: OSC1.3 U1.12 | length 235.4
  Top Layer w10: U1.12@3626.31,3417.88 3626.31,3381.52 ccw(c3693.52,3381.52) 3646,3334 cw(c3613.4,3301.4) 3659.5,3301.4 OSC1.3@3659.5,3191.31
NetR43_2: R43.2 U3.24 | length 3
  Bottom Layer w30: U3.24@3500.33,3548 ccw(c3500.33,3549.89) U3.24@3502.22,3549.89
NetR48_1: R48.1 R49.2 S1.1 | length 197.1
  Top Layer w30: S1.1@2981,3669 ccw(c2982,3669) 2982,3668 v1(3033,3668)
  Bottom Layer w30: R49.2@3003.09,3540.5 R48.1@3003.09,3593 ccw(c3003.09,3622.91) 3033,3622.91 v1(3033,3668)
NetR50_1: R50.1 R51.2 S2.1 | length 196.4
  Top Layer w30: v1(3087,3669) S2.1@3141,3669
  Bottom Layer w30: v1(3087,3669) 3087,3607.94 ccw(c3106.94,3607.94) R50.1@3106.94,3588 R51.2@3106.94,3538
NetR91_2: R91.2 R92.1 | length 82
  Top Layer w40: R92.1@4512,3778 R91.2@4594,3778
NetR93_1: R93.1 R94.2 | length 78
  Top Layer w40: R94.2@4174,2518.43 R93.1@4252,2518.43
PWM1: J2.1 U1.63 | length 918.4
  Top Layer w10: v1(3399,3798) 3545,3798 3546,3799 ccw(c3546,3899) 3646,3899 U1.63@3646,4028.12
  Bottom Layer w10: J2.1@2957,3818 2979.71,3840.71 cw(c3050.42,3770) 3013.67,3863 cw(c3050.42,3770) 3050.42,3870 3285.58,3870 cw(c3285.58,3770) 3356.29,3840.71 v1(3399,3798)
PWM2: J2.2 U1.64 | length 983.4
  Top Layer w10: v1(3399,3866.5) 3527.34,3866.5 ccw(c3527.34,3966.5) 3626,3950.17 ; 3526.31,3867 ccw(c3526.31,3967) 3626.31,3967 U1.64@3626.31,4028.12
  Bottom Layer w10: J2.2@2957,3918 2977.71,3938.71 cw(c3048.42,3868) 3048.42,3968 3256.08,3968 cw(c3256.08,3868) 3326.79,3938.71 v1(3399,3866.5)
PWM3: J2.3 U1.65 | length 783.1
  Top Layer w10: v1(3399,3935) 3544,3935 ccw(c3544,3997.63) 3606.63,3997.63 U1.65@3606.63,4028.12
  Bottom Layer w10: J2.3@2957,4018 2977.71,4038.71 cw(c3048.42,3968) 3048.42,4068 3224.58,4068 cw(c3224.58,3968) 3295.29,4038.71 v1(3399,3935)